# Altium PCB LPEDT_revA1_BikeIt.PcbDoc (part 2 of 3)
Units mil, origin at the board's own origin, x right, y up, seen from the top; angles counter-clockwise.
Board outline 2400 x 2400 mil, 2 copper layers (Top Layer, Bottom Layer), stack 61.756 mil thick; 103 components, 74 nets, 422 pads, 0 vias.
Unrouted connection lines stored in the file: 270.
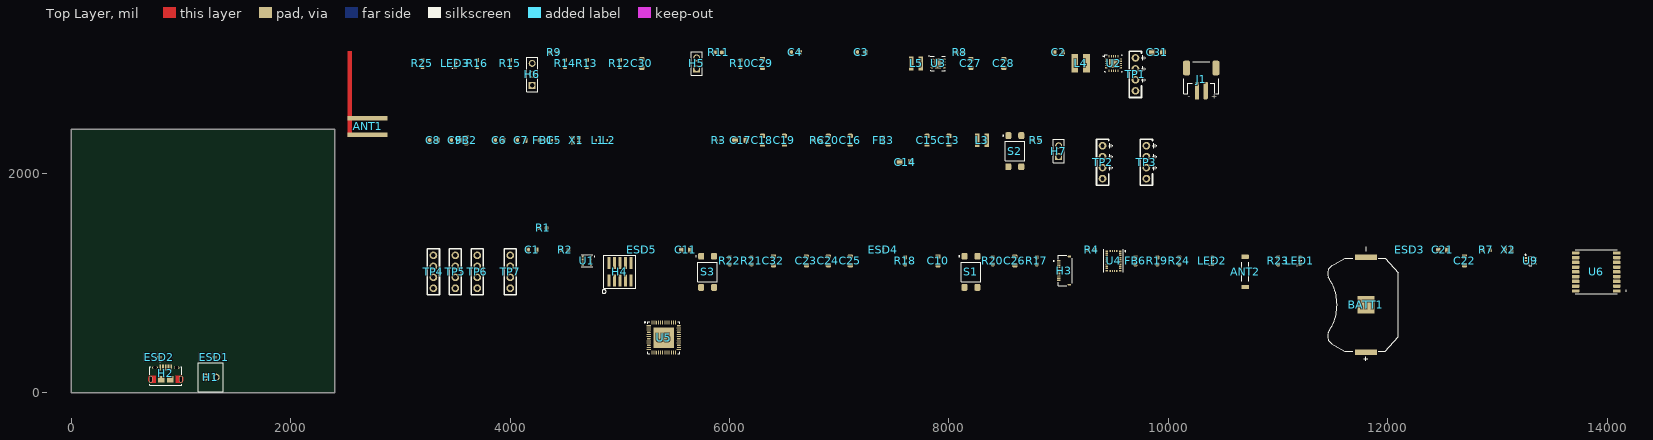
[diagram p0: Top Layer view]

## Part data (continued)
H1: library part 282834-2, "TE CONNECTIVITY / BUCHANAN - 282834-2 - TERMINAL BLOCK, WIRE TO BRD, 2POS, 16AWG", Color=Green, Current=10A, Flammability Rating="UL94 V-0", Manufacturer="TE Connectivity", Max Operating Temperature=105°C, Max Supply Voltage (AC)=150V, Min Operating Temperature=-40°C, Package Quantity=300, Supplier Part Number 1=A98333-ND, Approvals=UL, Category="Terminal Blocks", Closed End="No (Without)", ComponentLink1Description=https://datasheet.ciiva.com/11758/0900766b80e7dc96-11758675.pdf?src-supplier=RSComponents, ComponentLink1URL=https://datasheet.ciiva.com/11758/0900766b80e7dc96-11758675.pdf?src-supplier=RSComponents, ComponentLink2Description=https://datasheet.ciiva.com/16386/282834-2-16386363.pdf?src-supplier=Future+Electronics, ComponentLink2URL=https://datasheet.ciiva.com/16386/282834-2-16386363.pdf?src-supplier=Future+Electronics, ComponentLink3Description=https://datasheet.ciiva.com/14609/70086732-14609670.pdf?src-supplier=Allied+Electronics, ComponentLink3URL=https://datasheet.ciiva.com/14609/70086732-14609670.pdf?src-supplier=Allied+Electronics, ComponentLink4Description=https://datasheet.ciiva.com/15169/getdatasheetpartid-155864-15169558.pdf?src-supplier=Verical, ComponentLink4URL=https://datasheet.ciiva.com/15169/getdatasheetpartid-155864-15169558.pdf?src-supplier=Verical, ComponentLink5Description=https://datasheet.ciiva.com/16676/eng-cs-1308389-eurostyle-terminal-blocks-0607-16676126.pdf?src-supplier=Avnet+Europe, ComponentLink5URL=https://datasheet.ciiva.com/16676/eng-cs-1308389-eurostyle-terminal-blocks-0607-16676126.pdf?src-supplier=Avnet+Europe, ComponentLink6Description=https://datasheet.ciiva.com/30166/eng-cs-1308389-eurostyle-terminal-blocks-0607-30166974.pdf?src-supplier=Onlinecomponents.com, ComponentLink6URL=https://datasheet.ciiva.com/30166/eng-cs-1308389-eurostyle-terminal-blocks-0607-30166974.pdf?src-supplier=Onlinecomponents.com, ComponentLink7Description=https://datasheet.ciiva.com/3141/eng-cs-1308389-eurostyle-terminal-blocks-0607-3141115.pdf?src-supplier=Avnet, ComponentLink7URL=https://datasheet.ciiva.com/3141/eng-cs-1308389-eurostyle-terminal-blocks-0607-3141115.pdf?src-supplier=Avnet, ComponentLink8Description=https://datasheet.ciiva.com/823/eng-cd-282834-c1-823453.pdf?src-supplier=Digi-Key, ComponentLink8URL=https://datasheet.ciiva.com/823/eng-cd-282834-c1-823453.pdf?src-supplier=Digi-Key, Connector Type=Receptacle, Contact Material=Brass, Contact Plating=Tin, Current Rating=10A, Depth=6.5mm, ELV=Compliant, Gender=Male, Housing Color=Green, Housing Material=Polyamide, Interlock="No (Without)", Lead Free="Lead Free", Length=5.54mm, Manufacturer Part Number=282834-2, Material=Nylon, Max Current Rating=10A, Max Voltage Rating (AC)=150V, Mount="Through Hole", Number of Circuits=2, Number of Contacts=2, Number of Levels=1, Number of Poles=2, Number of Positions=2, Number of Positions Per Level=2, Number of Rows=1, Orientation=Straight, Packaging=Bulk, Pitch=2.54mm, Plating=Brass,Steel, Pricing 1="1=1.27000, 10=0.89500, 25=0.83440, 50=0.75740, 100=0.75410, 250=0.63676, 500=0.60324, 1000=0.53622, 5000=0.50270 (USD)", Radiation Hardening=No, REACH SVHC=Unknown, RoHS=Yes, RoHS Compliant=Yes, Screw Flange="No (Without)", Screwless Terminal Block="Yes (With)", Series=Buchanan, Side Stackable="Yes (With)", Stock 1=20643, Supplier 1=Digi-Key, Tail Length=3.4mm, Termination=Solder, Thread Size=M1.6, Voltage=150V, Voltage Rating=150V, Width=6.5mm, Wire Gauge (Max)=30AWG, Wire Gauge (Min)=30AWG, Wire/Cable Gauge=30AWG
H2: library part 10118194-0001LF, "USB - micro B USB 2.0 Receptacle Connector 5 Position Surface Mount, Right Angle; Through Hole", Color=Black, Current Rating=1.8A, Flammability Rating="UL94 V-0", Insulation Resistance=1GR, Manufacturer="Amphenol FCI", Max Operating Temperature=85°C, Max Voltage Rating (AC)=100V, Min Operating Temperature=-55°C, Package Quantity=9600, Supplier Part Number 1=609-4618-6-ND, Category="USB Connectors", ComponentLink1Description=https://datasheet.ciiva.com/4598/10118194ac-197217-4598807.pdf?src-supplier=Mouser, ComponentLink1URL=https://datasheet.ciiva.com/4598/10118194ac-197217-4598807.pdf?src-supplier=Mouser, ComponentLink2Description=https://datasheet.ciiva.com/26945/getdatasheetpartid-418619-26945695.pdf?src-supplier=Verical, ComponentLink2URL=https://datasheet.ciiva.com/26945/getdatasheetpartid-418619-26945695.pdf?src-supplier=Verical, ComponentLink3Description=https://datasheet.ciiva.com/851/10118194-851110.pdf?src-supplier=Digi-Key, ComponentLink3URL=https://datasheet.ciiva.com/851/10118194-851110.pdf?src-supplier=Digi-Key, ComponentLink4Description=https://datasheet.ciiva.com/851/10118194-851111.pdf?src-supplier=Digi-Key, ComponentLink4URL=https://datasheet.ciiva.com/851/10118194-851111.pdf?src-supplier=Digi-Key, Connector Type=USB,Receptacle, Contact Material="Copper Alloy", Contact Plating=Gold, Depth=5mm, Features=Shielded, Gender=Receptacle, Housing Material=Polymer, Lead Free="Lead Free", Length=8.05mm, Manufacturer Part Number=10118194-0001LF, Mount="Surface Mount,Horizontal", Number of Contacts=5, Number of Ports=1, Number of Terminals/Pins=5, Orientation="Right Angle", Packaging="Tape and Reel", Pitch=0.65mm, Pricing 1="1=0.48000, 10=0.45100, 25=0.38680, 50=0.32860, 100=0.31580, 250=0.28360, 500=0.27070 (USD)", Radiation Hardening=No, RoHS=Yes, Stock 1=87961, Supplier 1=Digi-Key, Termination=Solder
H3: library part AYF531035A, "10 Position 0.5 mm Solder Right Angle FFC / FPC SMD Socket", Current Rating=500mA, Flammability Rating="UL94 V-0", Manufacturer=Panasonic, Max Operating Temperature=85°C, Min Operating Temperature=-55°C, Package Quantity=500, Supplier Part Number 1=255-5667-ND, Voltage Rating=50V, Actuator Material="Polymer,Liquid Crystal Polymer", Category="FFC / FPC", ComponentLink1Description=https://www3.panasonic.biz/ac/e_download/control/connector/fpc-ffc/catalog/con_eng_y5bw.pdf?src-supplier=Digi-Key, ComponentLink1URL=https://www3.panasonic.biz/ac/e_download/control/connector/fpc-ffc/catalog/con_eng_y5bw.pdf?src-supplier=Digi-Key, ComponentLink2Description=http://www3.panasonic.biz/ac/e_download/control/connector/fpc-ffc/catalog/con_eng_y5bw.pdf?src-supplier=Digi-Key, ComponentLink2URL=http://www3.panasonic.biz/ac/e_download/control/connector/fpc-ffc/catalog/con_eng_y5bw.pdf?src-supplier=Digi-Key, Contact Material="Copper Alloy", Contact Plating=Gold, Housing Material=Polymer, Lead Free="Lead Free", Manufacturer Part Number=AYF531035A, Mount="Surface Mount", Number of Positions=10, Packaging="Cut Strip", Pitch=0.02inch, Pricing 1="1=0.93000, 10=0.81600, 25=0.76800, 50=0.73600, 100=0.70400, 250=0.64000, 500=0.57600, 1000=0.51200, 2500=0.46400 (USD)", RoHS=Yes, Stock 1=2493, Supplier 1=Digi-Key, Termination=Solder
H4: library part FTSH-105-01-LM-DV-K, "Conn Unshrouded Header HDR 10 POS 1.27mm Solder ST SMD Tube", Housing Color=Black, Manufacturer=Samtec, Max Operating Temperature=125°C, Min Operating Temperature=-55°C, Supplier Part Number 1=SAM9441-ND, Category=Connectors, ComponentLink1Description=https://datasheet.ciiva.com/16689/ftsh-mt-16689356.pdf?src-supplier=Avnet+Europe, ComponentLink1URL=https://datasheet.ciiva.com/16689/ftsh-mt-16689356.pdf?src-supplier=Avnet+Europe, ComponentLink2Description=https://datasheet.ciiva.com/10245/ftsh-mt-10245149.pdf?src-supplier=Avnet, ComponentLink2URL=https://datasheet.ciiva.com/10245/ftsh-mt-10245149.pdf?src-supplier=Avnet, Contact Material=Bronze, Contact Plating=Gold, Depth=3.43mm, Gender=Male, Housing Material=Polymer, Length=6.35mm, Manufacturer Part Number=FTSH-105-01-LM-DV-K, Number of Contacts=10, Number of Rows=2, Orientation=Straight, Packaging=Rail/Tube, Pitch=1.27mm, Pricing 1="1=2.93000, 10=2.81700, 100=2.34750, 500=1.99536, 1000=1.70192, 5000=1.52586 (USD)", Radiation Hardening=No, RoHS=Yes, Stock 1=2459, Supplier 1=Digi-Key, Termination=Solder
H5 H7: library part PRPC002SAAN-RC, "CONN HEADER VERT 2POS 2.54MM", Color=Black, Manufacturer=Sullins, Standard Package=1, Supplier Part Number 1=S1011EC-02-ND, Category="Connectors, Interconnects", ComponentLink1Description=https://media.digikey.com/PDF/Data%20Sheets/Sullins%20PDFs/xRxCzzzSxxN-RC_ST_11635-B.pdf?src-supplier=Digi-Key, ComponentLink1URL=https://media.digikey.com/PDF/Data%20Sheets/Sullins%20PDFs/xRxCzzzSxxN-RC_ST_11635-B.pdf?src-supplier=Digi-Key, Connector Type="Header, Unshrouded, Breakaway", Contact Finish=Gold, Contact Finish Thickness=Flash, Contact Mating Length="0.230\" (5.84mm)", Contact Type="Male Pin", Family="Rectangular Connectors - Headers, Male Pins", Fastening Type=-, Features=-, Manufacturer Part Number=PRPC002SAAN-RC, Mounting Type="Through Hole", Number of Positions=2, Number of Positions Loaded=All, Number of Rows=1, Online Catalog="0.100\" (2.54mm) Pitch Connector Headers", Other Names="S9510E-02  S9510E-02-ND", Packaging=Bulk, Pitch="0.100\" (2.54mm)", Pricing 1="1=0.08, 10=0.073, 25=0.054, 50=0.0464, 100=0.0449, 250=0.0387, 500=0.0372 (USD)", Row Spacing=-, Series=-, Stock 1=42739, Supplier 1=Digi-Key, Termination=Solder
H6: library part PRPC003SAAN-RC, "CONN HEADER VERT 3POS 2.54MM", Color=Black, Manufacturer=Sullins, Standard Package=1, Supplier Part Number 1=S1011EC-03-ND, Category="Connectors, Interconnects", ComponentLink1Description=https://media.digikey.com/PDF/Data%20Sheets/Sullins%20PDFs/xRxCzzzSxxN-RC_ST_11635-B.pdf?src-supplier=Digi-Key, ComponentLink1URL=https://media.digikey.com/PDF/Data%20Sheets/Sullins%20PDFs/xRxCzzzSxxN-RC_ST_11635-B.pdf?src-supplier=Digi-Key, Connector Type="Header, Unshrouded, Breakaway", Contact Finish=Gold, Contact Finish Thickness=Flash, Contact Mating Length="0.230\" (5.84mm)", Contact Type="Male Pin", Family="Rectangular Connectors - Headers, Male Pins", Fastening Type=-, Features=-, Manufacturer Part Number=PRPC003SAAN-RC, Mounting Type="Through Hole", Number of Positions=3, Number of Positions Loaded=All, Number of Rows=1, Online Catalog="0.100\" (2.54mm) Pitch Connector Headers", Other Names="S9510E-03  S9510E-03-ND", Packaging=Bulk, Pitch="0.100\" (2.54mm)", Pricing 1="1=0.12, 10=0.109, 25=0.0812, 50=0.0696, 100=0.0673, 250=0.058, 500=0.0557 (USD)", Row Spacing=-, Series=-, Stock 1=19067, Supplier 1=Digi-Key, Termination=Solder
J1: library part S2B-PH-SM4-TB(LF)(SN), "JST PH Series, 2 Position, Side Entry, 2.00mm, Solder, Surface Mount, Natural", Manufacturer=JST, Supplier Part Number 1=38K8067, ComponentLink1Description=http://datasheet.octopart.com/S2B-PH-SM4-TB%28LF%29%28SN%29-JST-datasheet-10411123.pdf?src-supplier=Future+Electronics, ComponentLink1URL=http://datasheet.octopart.com/S2B-PH-SM4-TB%28LF%29%28SN%29-JST-datasheet-10411123.pdf?src-supplier=Future+Electronics, ComponentLink2Description=http://datasheet.octopart.com/S2B-PH-SM4-TB%28LF%29%28SN%29-JST-datasheet-8324864.pdf?src-supplier=Future+Electronics, ComponentLink2URL=http://datasheet.octopart.com/S2B-PH-SM4-TB%28LF%29%28SN%29-JST-datasheet-8324864.pdf?src-supplier=Future+Electronics, ComponentLink3Description=http://datasheet.octopart.com/S2B-PH-SM4-TB%28LF%29%28SN%29-JST-datasheet-15068535.pdf?src-supplier=Newark, ComponentLink3URL=http://datasheet.octopart.com/S2B-PH-SM4-TB%28LF%29%28SN%29-JST-datasheet-15068535.pdf?src-supplier=Newark, ComponentLink4Description=http://datasheet.octopart.com/S2B-PH-SM4-TB%28LF%29%28SN%29-JST-datasheet-56537.pdf?src-supplier=Future+Electronics, ComponentLink4URL=http://datasheet.octopart.com/S2B-PH-SM4-TB%28LF%29%28SN%29-JST-datasheet-56537.pdf?src-supplier=Future+Electronics, ComponentLink5Description=http://datasheet.octopart.com/S2B-PH-SM4-TB%28LF%29%28SN%29-JST-datasheet-515537.pdf?src-supplier=Farnell, ComponentLink5URL=http://datasheet.octopart.com/S2B-PH-SM4-TB%28LF%29%28SN%29-JST-datasheet-515537.pdf?src-supplier=Farnell, ComponentLink6Description=http://datasheet.octopart.com/S2B-PH-SM4-TB%28LF%29%28SN%29-JST-datasheet-12510261.pdf?src-supplier=Future+Electronics, ComponentLink6URL=http://datasheet.octopart.com/S2B-PH-SM4-TB%28LF%29%28SN%29-JST-datasheet-12510261.pdf?src-supplier=Future+Electronics, Manufacturer Part Number=S2B-PH-SM4-TB(LF)(SN), Pricing 1="1=0.58000, 10=0.54700, 100=0.41940, 500=0.36470 (USD)", Stock 1=117838, Supplier 1=Newark
L1 L2: library part LQG15WZ1N9S02D, "1.9nH Unshielded Multilayer Inductor 1A 50mOhm Max 0402 (1005 Metric)", Supplier Part Number 1=490-LQG15WZ1N9S02DCT-ND, Category="Fixed Inductors", RoHS=No, Supplier 1=Digi-Key
L3: library part 744025004, "Fixed Inductors WE-TPC 2828 4.7uH 1.35A .1Ohm", Case/Package=Nonstandard, Current Rating=1.35A, DC Resistance (DCR)=120mR, Inductance=4.7uH, Inductance Tolerance=20%, Manufacturer="Wurth Electronics", Max Operating Temperature=125°C, Min Operating Temperature=-40°C, Package Quantity=550, Resistor Type=Wirewound, Saturation Current=1.7A, Self Resonant Frequency=84MHz, Series Resistance=100mR, Supplier Part Number 1=732-2615-1-ND, Test Frequency=100kHz, Category="Fixed Inductors", ComponentLink1Description=https://datasheet.ciiva.com/6690/744025004-6690389.pdf?src-supplier=Digi-Key, ComponentLink1URL=https://datasheet.ciiva.com/6690/744025004-6690389.pdf?src-supplier=Digi-Key, ComponentLink2Description=https://datasheet.ciiva.com/11803/0900766b80f886b6-11803593.pdf?src-supplier=RSComponents, ComponentLink2URL=https://datasheet.ciiva.com/11803/0900766b80f886b6-11803593.pdf?src-supplier=RSComponents, ComponentLink3Description=https://datasheet.ciiva.com/4954/744025004-76625-4954718.pdf?src-supplier=Mouser, ComponentLink3URL=https://datasheet.ciiva.com/4954/744025004-76625-4954718.pdf?src-supplier=Mouser, ComponentLink4Description=https://datasheet.ciiva.com/6690/744025004-6690390.pdf?src-supplier=Digi-Key, ComponentLink4URL=https://datasheet.ciiva.com/6690/744025004-6690390.pdf?src-supplier=Digi-Key, ComponentLink5Description=https://datasheet.ciiva.com/14123/744025004-eng-tds-14123830.pdf?src-supplier=Distrelec, ComponentLink5URL=https://datasheet.ciiva.com/14123/744025004-eng-tds-14123830.pdf?src-supplier=Distrelec, ComponentLink6Description=https://datasheet.ciiva.com/6690/744025004-6690391.pdf?src-supplier=Digi-Key, ComponentLink6URL=https://datasheet.ciiva.com/6690/744025004-6690391.pdf?src-supplier=Digi-Key, ComponentLink7Description=https://datasheet.ciiva.com/7650/1243426-7650570.pdf?src-supplier=Element14, ComponentLink7URL=https://datasheet.ciiva.com/7650/1243426-7650570.pdf?src-supplier=Element14, Core Material=Ferrite, Depth=2.8mm, Height=2.8mm, Height - Seated (Max)=0.118inch, Length=2.8mm, Manufacturer Part Number=744025004, Max DC Current=1.35A, Mount="Surface Mount", Number of Pins=2, Packaging="Cut Tape", Pricing 1="1=1.54000, 10=1.48000, 50=1.36000, 100=1.13000, 250=1.02000 (USD)", REACH SVHC=Unknown, RMS Current (Irms)=1.35A, RoHS=Yes, Shielding=Shielded, Stock 1=11294, Supplier 1=Digi-Key, Termination=SMD/SMT, Tolerance=20%, Width=0.11inch
L4: library part 744031220, "Power Inductor (SMD), 22 µH, 510 mA, Shielded, 360 mA, WE-TPC Series, 3.8mm x 3.8mm x 1.65mm", Case/Package=Nonstandard, Current Rating=510mA, DC Resistance (DCR)=450mR, Inductance=22uH, Inductance Tolerance=30%, Manufacturer="Wurth Electronics", Max Operating Temperature=125°C, Min Operating Temperature=-40°C, Package Quantity=1000, Resistor Type=Wirewound, Saturation Current=360mA, Self Resonant Frequency=26MHz, Supplier Part Number 1=732-1012-1-ND, Test Frequency=100kHz, Category="Fixed Inductors", ComponentLink1Description=https://datasheet.ciiva.com/11800/0900766b8079f7b9-11800353.pdf?src-supplier=RSComponents, ComponentLink1URL=https://datasheet.ciiva.com/11800/0900766b8079f7b9-11800353.pdf?src-supplier=RSComponents, ComponentLink2Description=https://datasheet.ciiva.com/7210/744031220-7210946.pdf?src-supplier=Newark, ComponentLink2URL=https://datasheet.ciiva.com/7210/744031220-7210946.pdf?src-supplier=Newark, ComponentLink3Description=https://datasheet.ciiva.com/4961/744031220-79613-4961173.pdf?src-supplier=Mouser, ComponentLink3URL=https://datasheet.ciiva.com/4961/744031220-79613-4961173.pdf?src-supplier=Mouser, ComponentLink4Description=https://datasheet.ciiva.com/1058/744031220-1058566.pdf?src-supplier=Digi-Key, ComponentLink4URL=https://datasheet.ciiva.com/1058/744031220-1058566.pdf?src-supplier=Digi-Key, ComponentLink5Description=https://datasheet.ciiva.com/1058/744031220-1058567.pdf?src-supplier=Digi-Key, ComponentLink5URL=https://datasheet.ciiva.com/1058/744031220-1058567.pdf?src-supplier=Digi-Key, ComponentLink6Description=https://datasheet.ciiva.com/7691/744031220-7691543.pdf?src-supplier=Element14, ComponentLink6URL=https://datasheet.ciiva.com/7691/744031220-7691543.pdf?src-supplier=Element14, ComponentLink7Description=https://datasheet.ciiva.com/14123/lp744031220-data-de-14123802.pdf?src-supplier=Distrelec, ComponentLink7URL=https://datasheet.ciiva.com/14123/lp744031220-data-de-14123802.pdf?src-supplier=Distrelec, Core Material=Ferrite, Depth=3.8mm, Height=1.65mm, Height - Seated (Max)=0.071inch, Lead Free="Lead Free", Lead Pitch=1.1mm, Length=3.8mm, Manufacturer Part Number=744031220, Max DC Current=510mA, Mount="Surface Mount", Number of Pins=2, Packaging="Cut Tape", Pricing 1="1=1.43000, 10=1.38900, 50=1.21500, 100=1.11100, 500=0.98000 (USD)", REACH SVHC=Unknown, RMS Current (Irms)=510mA, RoHS=Yes, RoHS Compliant=Yes, Series=WE-TPC, Shielding=Shielded, Stock 1=14781, Supplier 1=Digi-Key, Termination=SMD/SMT, Tolerance=30%, Weight=0.003633oz, Width=3.8mm
L5: library part 744029100, "FIXED IND 10UH 650MA 470 MOHM", Case/Package=Nonstandard, Current Rating=1.35A, DC Resistance (DCR)=120mR, Inductance=4.7uH, Inductance Tolerance=20%, Manufacturer="Wurth Electronics", Manufacturer Part Number=744025004, Max Operating Temperature=125°C, Min Operating Temperature=-40°C, Package Quantity=550, Resistor Type=Wirewound, Saturation Current=1.7A, Self Resonant Frequency=84MHz, Series Resistance=100mR, Supplier Part Number 1=732-1091-1-ND, Test Frequency=100kHz, Category="Fixed Inductors", ComponentLink1Description=https://datasheet.ciiva.com/6690/744025004-6690389.pdf?src-supplier=Digi-Key, ComponentLink1URL=https://datasheet.ciiva.com/6690/744025004-6690389.pdf?src-supplier=Digi-Key, ComponentLink2Description=https://datasheet.ciiva.com/11803/0900766b80f886b6-11803593.pdf?src-supplier=RSComponents, ComponentLink2URL=https://datasheet.ciiva.com/11803/0900766b80f886b6-11803593.pdf?src-supplier=RSComponents, ComponentLink3Description=https://datasheet.ciiva.com/4954/744025004-76625-4954718.pdf?src-supplier=Mouser, ComponentLink3URL=https://datasheet.ciiva.com/4954/744025004-76625-4954718.pdf?src-supplier=Mouser, ComponentLink4Description=https://datasheet.ciiva.com/6690/744025004-6690390.pdf?src-supplier=Digi-Key, ComponentLink4URL=https://datasheet.ciiva.com/6690/744025004-6690390.pdf?src-supplier=Digi-Key, ComponentLink5Description=https://datasheet.ciiva.com/14123/744025004-eng-tds-14123830.pdf?src-supplier=Distrelec, ComponentLink5URL=https://datasheet.ciiva.com/14123/744025004-eng-tds-14123830.pdf?src-supplier=Distrelec, ComponentLink6Description=https://datasheet.ciiva.com/6690/744025004-6690391.pdf?src-supplier=Digi-Key, ComponentLink6URL=https://datasheet.ciiva.com/6690/744025004-6690391.pdf?src-supplier=Digi-Key, ComponentLink7Description=https://datasheet.ciiva.com/7650/1243426-7650570.pdf?src-supplier=Element14, ComponentLink7URL=https://datasheet.ciiva.com/7650/1243426-7650570.pdf?src-supplier=Element14, Core Material=Ferrite, Depth=2.8mm, Height=2.8mm, Height - Seated (Max)=0.118inch, Length=2.8mm, Max DC Current=1.35A, Mount="Surface Mount", Number of Pins=2, Packaging="Cut Tape", Pricing 1="1=1.54000, 10=1.48000, 50=1.36000, 100=1.13000, 250=1.02000 (USD)", REACH SVHC=Unknown, RMS Current (Irms)=1.35A, RoHS=Yes, Shielding=Shielded, Stock 1=11683, Supplier 1=Digi-Key, Termination=SMD/SMT, Tolerance=20%, Width=0.11inch
LED1: library part 150060RS75000, "WURTH ELEKTRONIK - 150060RS75000 - LED, Red, 625 nm, 2 V, 30 mA, 250 mcd RoHS Compliant: Yes", Case Code (Imperial)=0603, Case Code (Metric)=1608, Color=Red, Forward Current=30mA, Forward Voltage=2V, Manufacturer="Wurth Electronics", Max Operating Temperature=85°C, Min Operating Temperature=-40°C, Package Quantity=1, Supplier Part Number 1=732-4978-1-ND, Test Current=20mA, Case/Package=0603, Category=LEDs, ComponentLink1Description=https://datasheet.ciiva.com/29563/150060rs75000-29563040.pdf?src-supplier=Digi-Key, ComponentLink1URL=https://datasheet.ciiva.com/29563/150060rs75000-29563040.pdf?src-supplier=Digi-Key, ComponentLink2Description=https://datasheet.ciiva.com/29279/759428-da-01-en-chipled-0603-w-kl-rot-150060rs75000-29279196.pdf?src-supplier=Conrad, ComponentLink2URL=https://datasheet.ciiva.com/29279/759428-da-01-en-chipled-0603-w-kl-rot-150060rs75000-29279196.pdf?src-supplier=Conrad, Dominant Wavelength=625nm, Height=0.7mm, Length=1.6mm, Lens Style=Clear,Rectangular, Luminous Intensity=250mcd, Manufacturer Part Number=150060RS75000, Mount="Surface Mount", Packaging="Cut Tape", Pricing 1="1=0.14000, 50=0.13300, 100=0.11400, 500=0.09990 (USD)", REACH SVHC=Unknown, RoHS=Yes, RoHS Compliant=Yes, Stock 1=173130, Supplier 1=Digi-Key, Viewing Angle=140°, Wavelength=625nm, Width=0.8mm
LED2 LED3: library part 150060YS75000, "WURTH ELEKTRONIK - 150060YS75000 - LED, Yellow, SMD, 0603, 30 mA, 2 V, 590 nm", Case Code (Imperial)=0603, Case Code (Metric)=1608, Color=Yellow, Forward Current=30mA, Forward Voltage=2V, Manufacturer="Wurth Electronics", Max Operating Temperature=85°C, Min Operating Temperature=-40°C, Package Quantity=4000, Supplier Part Number 1=732-4981-1-ND, Test Current=20mA, Case/Package=0603, Category=LEDs, ComponentLink1Description=https://datasheet.ciiva.com/23843/150060ys75000-23843250.pdf?src-supplier=Newark, ComponentLink1URL=https://datasheet.ciiva.com/23843/150060ys75000-23843250.pdf?src-supplier=Newark, ComponentLink2Description=https://datasheet.ciiva.com/29279/759432-da-01-en-chipled-0603-w-kl-gelb-150060ys75000-29279206.pdf?src-supplier=Conrad, ComponentLink2URL=https://datasheet.ciiva.com/29279/759432-da-01-en-chipled-0603-w-kl-gelb-150060ys75000-29279206.pdf?src-supplier=Conrad, ComponentLink3Description=https://datasheet.ciiva.com/29563/150060ys75000-29563045.pdf?src-supplier=Digi-Key, ComponentLink3URL=https://datasheet.ciiva.com/29563/150060ys75000-29563045.pdf?src-supplier=Digi-Key, ComponentLink4Description=https://datasheet.ciiva.com/22656/1911348-22656951.pdf?src-supplier=Element14, ComponentLink4URL=https://datasheet.ciiva.com/22656/1911348-22656951.pdf?src-supplier=Element14, ComponentLink5Description=https://datasheet.ciiva.com/29563/150060ys75000-29563033.pdf?src-supplier=Digi-Key, ComponentLink5URL=https://datasheet.ciiva.com/29563/150060ys75000-29563033.pdf?src-supplier=Digi-Key, ComponentLink6Description=https://datasheet.ciiva.com/48430/150060ys75000-eng-tds-48430044.pdf?src-supplier=Distrelec, ComponentLink6URL=https://datasheet.ciiva.com/48430/150060ys75000-eng-tds-48430044.pdf?src-supplier=Distrelec, Dominant Wavelength=590nm, Height=0.7mm, Length=1.6mm, Lens Style=Clear,Rectangular, Luminous Intensity=120mcd, Manufacturer Part Number=150060YS75000, Mount="Surface Mount", Packaging="Tape and Reel", Pricing 1="1=0.14000, 50=0.13300, 100=0.11400, 500=0.09990 (USD)", REACH SVHC=Unknown, RoHS=Yes, RoHS Compliant=Yes, Stock 1=44523, Supplier 1=Digi-Key, Viewing Angle=140°, Wavelength=590nm, Width=0.8mm
R1 R2: library part RC0603FR-074K7L, "RES SMD 4.7k  1% 0603", Case Code (Imperial)=0603, Case Code (Metric)=1608, Manufacturer=Yageo, Max Operating Temperature=155°C, Max Power Dissipation=100mW, Min Operating Temperature=-55°C, Resistance=4.7kR, Resistance Tolerance=1%, Resistor Type="Thick Film", Supplier Part Number 1=311-4.70KHRCT-ND, Temperature Coefficient=100ppm/°C, Voltage Rating=50V, Case/Package=0603, Category="Chip SMD Resistors", ComponentLink1Description=https://datasheet.ciiva.com/15189/getdatasheetpartid-422754-15189760.pdf?src-supplier=Verical, ComponentLink1URL=https://datasheet.ciiva.com/15189/getdatasheetpartid-422754-15189760.pdf?src-supplier=Verical, ComponentLink2Description=https://datasheet.ciiva.com/22747/443971-22747528.pdf?src-supplier=Element14, ComponentLink2URL=https://datasheet.ciiva.com/22747/443971-22747528.pdf?src-supplier=Element14, ComponentLink3Description=https://datasheet.ciiva.com/7660/38590-7660794.pdf?src-supplier=Element14, ComponentLink3URL=https://datasheet.ciiva.com/7660/38590-7660794.pdf?src-supplier=Element14, ComponentLink4Description=https://datasheet.ciiva.com/7746/1868787-7746365.pdf?src-supplier=Element14, ComponentLink4URL=https://datasheet.ciiva.com/7746/1868787-7746365.pdf?src-supplier=Element14, ComponentLink5Description=https://datasheet.ciiva.com/46440/1868787-46440909.pdf?src-supplier=Element14, ComponentLink5URL=https://datasheet.ciiva.com/46440/1868787-46440909.pdf?src-supplier=Element14, ComponentLink6Description=https://datasheet.ciiva.com/7746/1738695-7746366.pdf?src-supplier=Element14, ComponentLink6URL=https://datasheet.ciiva.com/7746/1738695-7746366.pdf?src-supplier=Element14, Construction=Rectangular, Depth=0.8mm, Features="Moisture Resistant", Height=0.45mm, Lead Free="Lead Free", Lead Pitch=0.3mm, Length=1.6mm, Manufacturer Part Number=RC0603FR-074K7L, Military Standard=Not, Number of Pins=2, Number of Terminations=2, Packaging="Tape and Reel", Power Rating=100mW, Pricing 1="1=0.10000, 10=0.02300, 100=0.00930, 1000=0.00417, 2500=0.00362 (USD)", REACH SVHC="No SVHC", RoHS=Yes, RoHS Compliant=Yes, Series=RC, Size Code=0603, Stock 1=3174335, Supplier 1=Digi-Key, Termination=SMD/SMT, Tolerance=1%, Voltage Rating (DC)=50V, Width=0.8mm
R3: library part RMCF0402ZT0R00, "RES SMD 0 OHM JUMPER 1/16W 0402", Case Code (Imperial)=0402, Case Code (Metric)=1005, Current Rating=1A, Manufacturer="Stackpole Electronics", Max Operating Temperature=155°C, Max Power Dissipation=63mW, Min Operating Temperature=-55°C, Resistance=0R, Resistor Type="Thick Film", Working Voltage=50V, Case/Package=0402, Category="Chip SMD Resistors", ComponentLink1Description=https://datasheet.ciiva.com/26835/getdatasheetpartid-409751-26835612.pdf?src-supplier=Verical, ComponentLink1URL=https://datasheet.ciiva.com/26835/getdatasheetpartid-409751-26835612.pdf?src-supplier=Verical, Construction=Rectangular, Contact Plating=Tin,Matte, Depth=0.5mm, Features="Automotive AEC-Q200", Height=0.016inch, Lead Free="Lead Free", Length=0.039inch, Manufacturer Part Number=RMCF0402ZT0R00, Military Standard=Not, Mount="Surface Mount", Number of Terminations=2, Packaging="Tape and Reel", Power Rating=63mW, Pricing 1="1=0.10000, 10=0.01000, 25=0.00720, 50=0.00560, 100=0.00410, 250=0.00316, 500=0.00252, 1000=0.00186, 5000=0.00133 (USD)", Radiation Hardening=No, RoHS=Yes, RoHS Compliant=Yes, Series=RMCF, Stock 1=5982991, Supplier 1=Digi-Key, Technology="THICK FILM", Width=0.02inch
R4 R21: library part CPF0603B1M0E1, "Res Thin Film 0603 1M Ohm 0.1% 1/16W ±25ppm/°C Molded SMD SMD Paper T/R", Case Code (Imperial)=0603, Case Code (Metric)=1608, Manufacturer="TE Connectivity Neohm", Max Operating Temperature=155°C, Max Power Dissipation=63mW, Min Operating Temperature=-55°C, Number of Resistors=1, Package Quantity=1000, Resistance=1MR, Resistance Tolerance=0.1%, Resistor Type="Thin Film", Supplier Part Number 1=A102234CT-ND, Temperature Coefficient=25ppm/°C, Voltage Rating=50V, Case/Package=0603, Category="Chip SMD Resistors", ComponentLink1Description=https://datasheet.ciiva.com/12793/eng-ds-1773200-i-12793711.pdf?src-supplier=Mouser, ComponentLink1URL=https://datasheet.ciiva.com/12793/eng-ds-1773200-i-12793711.pdf?src-supplier=Mouser, ComponentLink2Description=https://datasheet.ciiva.com/22670/1723857-22670697.pdf?src-supplier=Element14, ComponentLink2URL=https://datasheet.ciiva.com/22670/1723857-22670697.pdf?src-supplier=Element14, ComponentLink3Description=https://datasheet.ciiva.com/46382/1723857-46382668.pdf?src-supplier=Element14, ComponentLink3URL=https://datasheet.ciiva.com/46382/1723857-46382668.pdf?src-supplier=Element14, ELV=Compliant, Height=0.45mm, Lead Free="Lead Free", Length=1.55mm, Manufacturer Part Number=CPF0603B1M0E1, Mount="Surface Mount", Number of Terminations=2, Packaging="Tape and Reel", Power Rating=63mW, Pricing 1="1=0.59000, 10=0.42100, 100=0.21890 (USD)", REACH SVHC="No SVHC", RoHS=Yes, RoHS Compliant=Yes, Series="CPF, Neohm", Size Code=0603, Stock 1=104463, Supplier 1=Digi-Key, Termination=Solder, Tolerance=0.1%, Voltage Rating (DC)=50V, Weight=7.1E-05oz, Width=0.8mm
R5 R20 R22 R23 R24 R25: library part RMCF0603FT100R, "RES SMD 100 1%", Case Code (Imperial)=0603, Case Code (Metric)=1608, Manufacturer="Stackpole Electronics", Max Operating Temperature=155°C, Max Power Dissipation=100mW, Min Operating Temperature=-55°C, Resistance=100R, Resistor Type="Thick Film", Supplier Part Number 1=RMCF0603FT100RCT-ND, Temperature Coefficient=100ppm/°C, Tolerance=1%, Case/Package=0603, Category="Chip SMD Resistors", ComponentLink1Description=https://datasheet.ciiva.com/15215/getdatasheetpartid-360413-15215981.pdf?src-supplier=Verical, ComponentLink1URL=https://datasheet.ciiva.com/15215/getdatasheetpartid-360413-15215981.pdf?src-supplier=Verical, Construction=Rectangular, Contact Plating=Tin,Matte, Depth=0.8mm, Features="Automotive AEC-Q200", Height=0.022inch, Lead Free="Lead Free", Length=1.55mm, Manufacturer Part Number=RMCF0603FT100R, Military Standard=Not, Mount="Surface Mount", Number of Terminations=2, Packaging="Tape and Reel", Power Rating=100mW, Pricing 1="1=0.10000, 10=0.01600, 100=0.00650, 1000=0.00292, 2500=0.00253 (USD)", Radiation Hardening=No, RoHS=Yes, RoHS Compliant=Yes, Series=RMCF, Size Code=0603, Stock 1=1363320, Supplier 1=Digi-Key, Width=0.031inch
R6: library part ERJ-3RQF1R0V, "RES SMD 1 OHM 1% 1/10W 0603", Case Code (Imperial)=0603, Case Code (Metric)=1608, Manufacturer=Panasonic, Max Operating Temperature=125°C, Max Power Dissipation=100mW, Min Operating Temperature=-55°C, Package Quantity=5000, Resistance=1R, Resistance Tolerance=1%, Resistor Type="Thick Film", Supplier Part Number 1=P1.0AJCT-ND, Temperature Coefficient=200ppm/°C, Case/Package=0603, Category="Chip SMD Resistors", ComponentLink1Description=https://datasheet.ciiva.com/11810/0900766b80eefa12-11810728.pdf?src-supplier=RSComponents, ComponentLink1URL=https://datasheet.ciiva.com/11810/0900766b80eefa12-11810728.pdf?src-supplier=RSComponents, ComponentLink2Description=https://datasheet.ciiva.com/16396/aoa0000ce3-16396837.pdf?src-supplier=Future+Electronics, ComponentLink2URL=https://datasheet.ciiva.com/16396/aoa0000ce3-16396837.pdf?src-supplier=Future+Electronics, ComponentLink3Description=https://datasheet.ciiva.com/28691/391509-28691973.pdf?src-supplier=Element14, ComponentLink3URL=https://datasheet.ciiva.com/28691/391509-28691973.pdf?src-supplier=Element14, ComponentLink4Description=https://datasheet.ciiva.com/16784/70068852-16784839.pdf?src-supplier=Allied+Electronics, ComponentLink4URL=https://datasheet.ciiva.com/16784/70068852-16784839.pdf?src-supplier=Allied+Electronics, ComponentLink5Description=https://datasheet.ciiva.com/9117/aoa0000ce3-9117368.pdf?src-supplier=Avnet, ComponentLink5URL=https://datasheet.ciiva.com/9117/aoa0000ce3-9117368.pdf?src-supplier=Avnet, ComponentLink6Description=https://datasheet.ciiva.com/24165/aoa0000ce3-72189-24165336.pdf?src-supplier=Mouser, ComponentLink6URL=https://datasheet.ciiva.com/24165/aoa0000ce3-72189-24165336.pdf?src-supplier=Mouser, ComponentLink7Description=https://datasheet.ciiva.com/30060/6aoa0000ce3-30060648.pdf?src-supplier=Onlinecomponents.com, ComponentLink7URL=https://datasheet.ciiva.com/30060/6aoa0000ce3-30060648.pdf?src-supplier=Onlinecomponents.com, ComponentLink8Description=https://datasheet.ciiva.com/6138/391509-6138777.pdf?src-supplier=Farnell, ComponentLink8URL=https://datasheet.ciiva.com/6138/391509-6138777.pdf?src-supplier=Farnell, ComponentLink9Description=https://datasheet.ciiva.com/16766/70068852-16766778.pdf?src-supplier=Allied+Electronics, ComponentLink9URL=https://datasheet.ciiva.com/16766/70068852-16766778.pdf?src-supplier=Allied+Electronics, ComponentLink10Description=https://datasheet.ciiva.com/16853/aoa0000ce3-16853436.pdf?src-supplier=Avnet+Europe, ComponentLink10URL=https://datasheet.ciiva.com/16853/aoa0000ce3-16853436.pdf?src-supplier=Avnet+Europe, ComponentLink11Description=https://datasheet.ciiva.com/43455/391509-43455868.pdf?src-supplier=Farnell, ComponentLink11URL=https://datasheet.ciiva.com/43455/391509-43455868.pdf?src-supplier=Farnell, ComponentLink12Description=https://datasheet.ciiva.com/28547/391509-28547230.pdf?src-supplier=Element14, ComponentLink12URL=https://datasheet.ciiva.com/28547/391509-28547230.pdf?src-supplier=Element14, Construction=Rectangular, Contact Plating=Tin, Depth=0.8mm, Height=0.45mm, Lead Free="Lead Free", Length=1.6mm, Manufacturer Part Number=ERJ-3RQF1R0V, Military Standard=Not, Mount="Surface Mount", Number of Pins=2, Number of Terminations=2, Packaging="Tape and Reel", Power Rating=100mW, Pricing 1="1=0.16000, 10=0.13600, 25=0.09920, 50=0.07200, 100=0.05330, 250=0.04092, 500=0.03224, 1000=0.02232 (USD)", Radiation Hardening=No, REACH SVHC="No SVHC", RoHS=Yes, RoHS Compliant=Yes, Series=ERJ, Size Code=0603, Stock 1=151763, Supplier 1=Digi-Key, Technology="THICK FILM", Termination=SMD/SMT, Tolerance=1%, Weight=7.1E-05oz, Width=0.8mm
R7: library part RC0603FR-07100KL, "RES SMD 100k  1% 1/10W 0603", Case Code (Imperial)=0603, Case Code (Metric)=1608, Manufacturer=Yageo, Max Operating Temperature=155°C, Max Power Dissipation=100mW, Min Operating Temperature=-55°C, Resistance=100kR, Resistance Tolerance=1%, Resistor Type="Thick Film", Supplier Part Number 1=311-100KHRCT-ND, Temperature Coefficient=100ppm/°C, Voltage Rating=50V, Working Voltage=75V, Case/Package=0603, Category="Chip SMD Resistors", ComponentLink1Description=https://datasheet.ciiva.com/11808/0900766b80f96399-11808107.pdf?src-supplier=RSComponents, ComponentLink1URL=https://datasheet.ciiva.com/11808/0900766b80f96399-11808107.pdf?src-supplier=RSComponents, ComponentLink2Description=https://datasheet.ciiva.com/46440/1868787-46440889.pdf?src-supplier=Element14, ComponentLink2URL=https://datasheet.ciiva.com/46440/1868787-46440889.pdf?src-supplier=Element14, ComponentLink3Description=https://datasheet.ciiva.com/7746/1738695-7746234.pdf?src-supplier=Element14, ComponentLink3URL=https://datasheet.ciiva.com/7746/1738695-7746234.pdf?src-supplier=Element14, ComponentLink4Description=https://datasheet.ciiva.com/7983/443971-7983593.pdf?src-supplier=Element14, ComponentLink4URL=https://datasheet.ciiva.com/7983/443971-7983593.pdf?src-supplier=Element14, ComponentLink5Description=https://datasheet.ciiva.com/7746/1738695-7746235.pdf?src-supplier=Element14, ComponentLink5URL=https://datasheet.ciiva.com/7746/1738695-7746235.pdf?src-supplier=Element14, ComponentLink6Description=https://datasheet.ciiva.com/22747/443971-22747516.pdf?src-supplier=Element14, ComponentLink6URL=https://datasheet.ciiva.com/22747/443971-22747516.pdf?src-supplier=Element14, Construction=Rectangular, Depth=0.8mm, Features="Moisture Resistant", Height=0.45mm, Lead Free="Lead Free", Length=1.6mm, Manufacturer Part Number=RC0603FR-07100KL, Military Standard=Not, Number of Pins=2, Number of Terminations=2, Packaging="Tape and Reel", Power Rating=100mW, Pricing 1="1=0.10000, 10=0.02300, 100=0.00930, 1000=0.00417, 2500=0.00362 (USD)", REACH SVHC="No SVHC", RoHS=Yes, RoHS Compliant=Yes, Series=RC, Stock 1=21765991, Supplier 1=Digi-Key, Technology="THICK FILM", Termination=SMD/SMT, Tolerance=1%, Voltage Rating (DC)=50V, Width=0.8mm
R8 R17 R18 R19: library part RC0603FR-0710KL, "RES SMD 10k 1% 1/10W 0603", Case Code (Imperial)=0603, Case Code (Metric)=1608, Manufacturer=Yageo, Max Operating Temperature=155°C, Max Power Dissipation=100mW, Min Operating Temperature=-55°C, Resistance=10kR, Resistance Tolerance=1%, Resistor Type="Thick Film", Supplier Part Number 1=311-10.0KHRCT-ND, Temperature Coefficient=100ppm/°C, Voltage Rating=75V, Voltage Rating (DC)=50V, Case/Package=0603, Category="Chip SMD Resistors", ComponentLink1Description=https://datasheet.ciiva.com/7660/38590-7660789.pdf?src-supplier=Element14, ComponentLink1URL=https://datasheet.ciiva.com/7660/38590-7660789.pdf?src-supplier=Element14, ComponentLink2Description=https://datasheet.ciiva.com/15189/getdatasheetpartid-409289-15189591.pdf?src-supplier=Verical, ComponentLink2URL=https://datasheet.ciiva.com/15189/getdatasheetpartid-409289-15189591.pdf?src-supplier=Verical, ComponentLink3Description=https://datasheet.ciiva.com/46440/1868787-46440891.pdf?src-supplier=Element14, ComponentLink3URL=https://datasheet.ciiva.com/46440/1868787-46440891.pdf?src-supplier=Element14, ComponentLink4Description=https://datasheet.ciiva.com/7983/443971-7983596.pdf?src-supplier=Element14, ComponentLink4URL=https://datasheet.ciiva.com/7983/443971-7983596.pdf?src-supplier=Element14, ComponentLink5Description=https://datasheet.ciiva.com/7746/1738695-7746239.pdf?src-supplier=Element14, ComponentLink5URL=https://datasheet.ciiva.com/7746/1738695-7746239.pdf?src-supplier=Element14, ComponentLink6Description=https://datasheet.ciiva.com/22747/443971-22747519.pdf?src-supplier=Element14, ComponentLink6URL=https://datasheet.ciiva.com/22747/443971-22747519.pdf?src-supplier=Element14, Construction=Rectangular, Depth=0.8mm, Features="Moisture Resistant", Height=0.45mm, Lead Free="Lead Free", Lead Pitch=0.3mm, Length=1.6mm, Manufacturer Part Number=RC0603FR-0710KL, Military Standard=Not, Number of Pins=2, Number of Terminations=2, Packaging="Tape and Reel", Power Rating=100mW, Pricing 1="1=0.10000, 10=0.02300, 100=0.00930, 1000=0.00417, 2500=0.00362 (USD)", REACH SVHC=Unknown, RoHS=Yes, RoHS Compliant=Yes, Series=RC, Size Code=0603, Stock 1=20705079, Supplier 1=Digi-Key, Termination=SMD/SMT, Tolerance=1%, Weight=7.1E-05oz, Width=0.8mm
R9: library part ERJ-3EKF6980V, "RES SMD 698 1% 1/10W 0603", Case Code (Imperial)=0603, Case Code (Metric)=1608, Manufacturer=Panasonic, Max Operating Temperature=155°C, Max Power Dissipation=100mW, Min Operating Temperature=-55°C, Package Quantity=1, Resistance=698R, Resistance Tolerance=1%, Resistor Type="Thick Film", Supplier Part Number 1=P698HCT-ND, Temperature Coefficient=100ppm/°C, Voltage Rating=75V, Voltage Rating (DC)=50V, Case/Package=0603, Category="Chip SMD Resistors", ComponentLink1Description=https://datasheet.ciiva.com/30063/aoa0000ce2-30063926.pdf?src-supplier=Onlinecomponents.com, ComponentLink1URL=https://datasheet.ciiva.com/30063/aoa0000ce2-30063926.pdf?src-supplier=Onlinecomponents.com, ComponentLink2Description=https://datasheet.ciiva.com/28547/1678782-28547032.pdf?src-supplier=Element14, ComponentLink2URL=https://datasheet.ciiva.com/28547/1678782-28547032.pdf?src-supplier=Element14, ComponentLink3Description=https://datasheet.ciiva.com/9180/aoa0000ce2-9180329.pdf?src-supplier=Avnet, ComponentLink3URL=https://datasheet.ciiva.com/9180/aoa0000ce2-9180329.pdf?src-supplier=Avnet, ComponentLink4Description=https://datasheet.ciiva.com/28694/1678782-28694457.pdf?src-supplier=Element14, ComponentLink4URL=https://datasheet.ciiva.com/28694/1678782-28694457.pdf?src-supplier=Element14, ComponentLink5Description=https://datasheet.ciiva.com/16774/70260748-16774443.pdf?src-supplier=Allied+Electronics, ComponentLink5URL=https://datasheet.ciiva.com/16774/70260748-16774443.pdf?src-supplier=Allied+Electronics, ComponentLink6Description=https://datasheet.ciiva.com/46378/426256-46378109.pdf?src-supplier=Element14, ComponentLink6URL=https://datasheet.ciiva.com/46378/426256-46378109.pdf?src-supplier=Element14, Construction=Rectangular, Contact Plating=Tin, Depth=0.8mm, Features="Automotive AEC-Q200", Height=0.45mm, Lead Free="Lead Free", Length=1.6mm, Manufacturer Part Number=ERJ-3EKF6980V, Military Standard=Not, Mount="Surface Mount", Number of Terminations=2, Packaging="Tape and Reel", Power Rating=100mW, Pricing 1="1=0.10000, 10=0.03500, 100=0.01430, 1000=0.00641, 2500=0.00557 (USD)", Radiation Hardening=No, REACH SVHC="No SVHC", RoHS=Yes, RoHS Compliant=Yes, Series=ERJ, Stock 1=57677, Supplier 1=Digi-Key, Technology="THICK FILM", Termination=SMD/SMT, Tolerance=1%, Width=0.031inch
R10: library part RC0603FR-074M75L, "RES SMD 4.75M 1% 1/10W 0603", Case Code (Imperial)=0603, Case Code (Metric)=1608, Manufacturer=Yageo, Max Operating Temperature=155°C, Max Power Dissipation=100mW, Min Operating Temperature=-55°C, Package Quantity=1, Resistance=4.75MR, Resistor Type="Thick Film", Temperature Coefficient=100ppm/°C, Tolerance=1%, Voltage Rating=75V, Voltage Rating (DC)=50V, Case/Package=0603, Category="Chip SMD Resistors", ComponentLink1Description=https://datasheet.ciiva.com/2455/pyu-r-int-thick-7-2455038.pdf?src-supplier=Digi-Key, ComponentLink1URL=https://datasheet.ciiva.com/2455/pyu-r-int-thick-7-2455038.pdf?src-supplier=Digi-Key, ComponentLink2Description=https://datasheet.ciiva.com/2455/pyu-r-int-thick-7-2455039.pdf?src-supplier=Digi-Key, ComponentLink2URL=https://datasheet.ciiva.com/2455/pyu-r-int-thick-7-2455039.pdf?src-supplier=Digi-Key, ComponentLink3Description=https://datasheet.ciiva.com/2455/pyu-r-int-thick-7-2455040.pdf?src-supplier=Digi-Key, ComponentLink3URL=https://datasheet.ciiva.com/2455/pyu-r-int-thick-7-2455040.pdf?src-supplier=Digi-Key, Construction=Rectangular, Depth=0.8mm, Features="Moisture Resistant", Height=0.022inch, Lead Free="Lead Free", Length=1.6mm, Manufacturer Part Number=RC0603FR-074M75L, Military Standard=Not, Number of Terminations=2, Packaging="Tape and Reel", Power Rating=100mW, Pricing 1="1=0.10000, 10=0.02300, 100=0.00930, 1000=0.00417, 2500=0.00362 (USD)", RoHS=Yes, RoHS Compliant=Yes, Series=RC, Stock 1=168754, Supplier 1=Digi-Key, Termination=SMD/SMT, Weight=7.1E-05oz, Width=0.031inch
R11: library part CRCW06038M25FKEA, "RES SMD 8.25M  1% 1/10W 0603", Case Code (Imperial)=0603, Case Code (Metric)=1608, Manufacturer=Vishay, Max Operating Temperature=155°C, Max Power Dissipation=100mW, Min Operating Temperature=-55°C, Package Quantity=10, Resistance=8.25MR, Resistance Tolerance=1%, Resistor Type="Thick Film", Supplier Part Number 1=541-8.25MHCT-ND, Temperature Coefficient=100ppm/°C, Voltage Rating=75V, Case/Package=0603, Category="Chip SMD Resistors", ComponentLink1Description=https://datasheet.ciiva.com/2513/dcrcwe3-2513731.pdf?src-supplier=Digi-Key, ComponentLink1URL=https://datasheet.ciiva.com/2513/dcrcwe3-2513731.pdf?src-supplier=Digi-Key, ComponentLink2Description=https://datasheet.ciiva.com/2513/dcrcwe3-2513732.pdf?src-supplier=Digi-Key, ComponentLink2URL=https://datasheet.ciiva.com/2513/dcrcwe3-2513732.pdf?src-supplier=Digi-Key, ComponentLink3Description=https://datasheet.ciiva.com/2513/dcrcwe3-2513733.pdf?src-supplier=Digi-Key, ComponentLink3URL=https://datasheet.ciiva.com/2513/dcrcwe3-2513733.pdf?src-supplier=Digi-Key, ComponentLink4Description=https://datasheet.ciiva.com/7748/1697337-7748717.pdf?src-supplier=Element14, ComponentLink4URL=https://datasheet.ciiva.com/7748/1697337-7748717.pdf?src-supplier=Element14, ComponentLink5Description=https://datasheet.ciiva.com/7748/1697337-7748718.pdf?src-supplier=Element14, ComponentLink5URL=https://datasheet.ciiva.com/7748/1697337-7748718.pdf?src-supplier=Element14, Construction=Rectangular, Contact Plating=Tin, Depth=0.85mm, Features="Automotive AEC-Q200", Height=0.02inch, Lead Free="Lead Free", Length=1.55mm, Manufacturer Part Number=CRCW06038M25FKEA, Military Standard=Not, Number of Terminations=2, Packaging="Tape and Reel", Power Rating=100mW, Pricing 1="1=0.10000, 10=0.03400, 100=0.01390, 1000=0.00624, 2500=0.00542 (USD)", Radiation Hardening=No, REACH SVHC=Unknown, RoHS=Yes, RoHS Compliant=Yes, Series=CRCW, Stock 1=13070, Supplier 1=Digi-Key, Termination=SMD/SMT, Tolerance=1%, Voltage Rating (DC)=75V, Weight=7.1E-05oz, Width=0.033inch
R12: library part CRCW06034M22FKEA, "RES SMD 4.22M 1% 1/10W 0603", Case Code (Imperial)=0603, Case Code (Metric)=1608, Manufacturer=Vishay, Max Operating Temperature=155°C, Max Power Dissipation=100mW, Min Operating Temperature=-55°C, Package Quantity=10, Resistance=4.22MR, Resistance Tolerance=1%, Resistor Type="Thick Film", Supplier Part Number 1=541-4.22MHCT-ND, Temperature Coefficient=100ppm/°C, Voltage Rating=75V, Case/Package=0603, Category="Chip SMD Resistors", ComponentLink1Description=https://datasheet.ciiva.com/2466/dcrcwe3-2466710.pdf?src-supplier=Digi-Key, ComponentLink1URL=https://datasheet.ciiva.com/2466/dcrcwe3-2466710.pdf?src-supplier=Digi-Key, ComponentLink2Description=https://datasheet.ciiva.com/2466/dcrcwe3-2466711.pdf?src-supplier=Digi-Key, ComponentLink2URL=https://datasheet.ciiva.com/2466/dcrcwe3-2466711.pdf?src-supplier=Digi-Key, ComponentLink3Description=https://datasheet.ciiva.com/9074/dcrcwe3-9074039.pdf?src-supplier=Avnet, ComponentLink3URL=https://datasheet.ciiva.com/9074/dcrcwe3-9074039.pdf?src-supplier=Avnet, ComponentLink4Description=https://datasheet.ciiva.com/2466/dcrcwe3-2466712.pdf?src-supplier=Digi-Key, ComponentLink4URL=https://datasheet.ciiva.com/2466/dcrcwe3-2466712.pdf?src-supplier=Digi-Key, ComponentLink5Description=https://datasheet.ciiva.com/5552/dcrcwe3-109170-5552601.pdf?src-supplier=Mouser, ComponentLink5URL=https://datasheet.ciiva.com/5552/dcrcwe3-109170-5552601.pdf?src-supplier=Mouser, ComponentLink6Description=https://datasheet.ciiva.com/3257/dcrcwe3-3257678.pdf?src-supplier=Avnet, ComponentLink6URL=https://datasheet.ciiva.com/3257/dcrcwe3-3257678.pdf?src-supplier=Avnet, ComponentLink7Description=https://datasheet.ciiva.com/22676/1700796-22676079.pdf?src-supplier=Element14, ComponentLink7URL=https://datasheet.ciiva.com/22676/1700796-22676079.pdf?src-supplier=Element14, Construction=Rectangular, Contact Plating=Tin, Depth=0.85mm, Features="Automotive AEC-Q200", Height=0.02inch, Lead Free="Lead Free", Length=1.55mm, Manufacturer Part Number=CRCW06034M22FKEA, Military Standard=Not, Number of Pins=2, Number of Terminations=2, Packaging="Tape and Reel", Power Rating=100mW, Pricing 1="1=0.10000, 10=0.03400, 100=0.01390, 1000=0.00624, 2500=0.00542 (USD)", Radiation Hardening=No, REACH SVHC=Unknown, RoHS=Yes, RoHS Compliant=Yes, Series=CRCW, Stock 1=3556, Supplier 1=Digi-Key, Termination=SMD/SMT, Tolerance=1%, Voltage Rating (DC)=75V, Weight=7.1E-05oz, Width=0.033inch
R13: library part RMCF0603FT8M06, "RES SMD 8.06M OHM 1% 1/10W 0603", Case/Package=0603, Manufacturer="Stackpole Electronics", Max Operating Temperature=155°C, Min Operating Temperature=-55°C, Resistance=8.06MR, Resistor Type="Thick Film", Supplier Part Number 1=RMCF0603FT8M06CT-ND, Temperature Coefficient=200ppm/°C, Tolerance=1%, Category="Chip SMD Resistors", ComponentLink1Description=https://www.seielect.com/catalog/SEI-RMCF_RMCP.pdf?src-supplier=Avnet, ComponentLink1URL=https://www.seielect.com/catalog/SEI-RMCF_RMCP.pdf?src-supplier=Avnet, ComponentLink2Description=https://www.seielect.com/catalog/SEI-Packaging.pdf?src-supplier=Digi-Key, ComponentLink2URL=https://www.seielect.com/catalog/SEI-Packaging.pdf?src-supplier=Digi-Key, ComponentLink3Description=https://www.seielect.com/catalog/sei-rmcf_rmcp.pdf?src-supplier=Digi-Key, ComponentLink3URL=https://www.seielect.com/catalog/sei-rmcf_rmcp.pdf?src-supplier=Digi-Key, Contact Plating=Tin,Matte, Manufacturer Part Number=RMCF0603FT8M06, Mount="Surface Mount", Packaging="Tape and Reel", Pricing 1="1=0.10000, 10=0.02400, 100=0.00970, 1000=0.00437, 2500=0.00380 (USD)", Radiation Hardening=No, RoHS=Yes, RoHS Compliant=Yes, Stock 1=5987, Supplier 1=Digi-Key
R14: library part RC0603FR-07715KL, "RES SMD 715k 1% 1/10W 0603", Case Code (Imperial)=0603, Manufacturer=Yageo, Max Operating Temperature=155°C, Max Power Dissipation=100mW, Min Operating Temperature=-55°C, Package Quantity=1, Resistance=715kR, Resistor Type="Thick Film", Supplier Part Number 1=311-715KHRCT-ND, Temperature Coefficient=100ppm/°C, Tolerance=1%, Voltage Rating (DC)=50V, Case/Package=0603, Category="Chip SMD Resistors", ComponentLink1Description=https://datasheet.ciiva.com/2454/pyu-r-int-thick-7-2454995.pdf?src-supplier=Digi-Key, ComponentLink1URL=https://datasheet.ciiva.com/2454/pyu-r-int-thick-7-2454995.pdf?src-supplier=Digi-Key, ComponentLink2Description=https://datasheet.ciiva.com/28388/pyu-rc0603-51-rohs-l-4-28388367.pdf?src-supplier=Avnet+Europe, ComponentLink2URL=https://datasheet.ciiva.com/28388/pyu-rc0603-51-rohs-l-4-28388367.pdf?src-supplier=Avnet+Europe, Construction=Rectangular, Contact Plating=Tin,Matte, Depth=0.8mm, Features="Moisture Resistant", Height=0.022inch, Lead Free="Lead Free", Length=0.063inch, Manufacturer Part Number=RC0603FR-07715KL, Military Standard=Not, Number of Terminations=2, Packaging="Tape and Reel", Power Rating=100mW, Pricing 1="1=0.10000, 10=0.02300, 100=0.00930, 1000=0.00417, 2500=0.00362 (USD)", RoHS=Yes, RoHS Compliant=Yes, Series=RC, Size Code=0603, Stock 1=77861, Supplier 1=Digi-Key, Width=0.031inch